# Altium PCB alarmlight_v1_0.PcbDoc
Units mil, origin at the board's own origin, x right, y up, seen from the top; angles counter-clockwise.
Board outline 1779.68 x 1779.68 mil, 2 copper layers (Top Layer, Bottom Layer); 36 components, 31 nets, 171 pads, 55 vias.
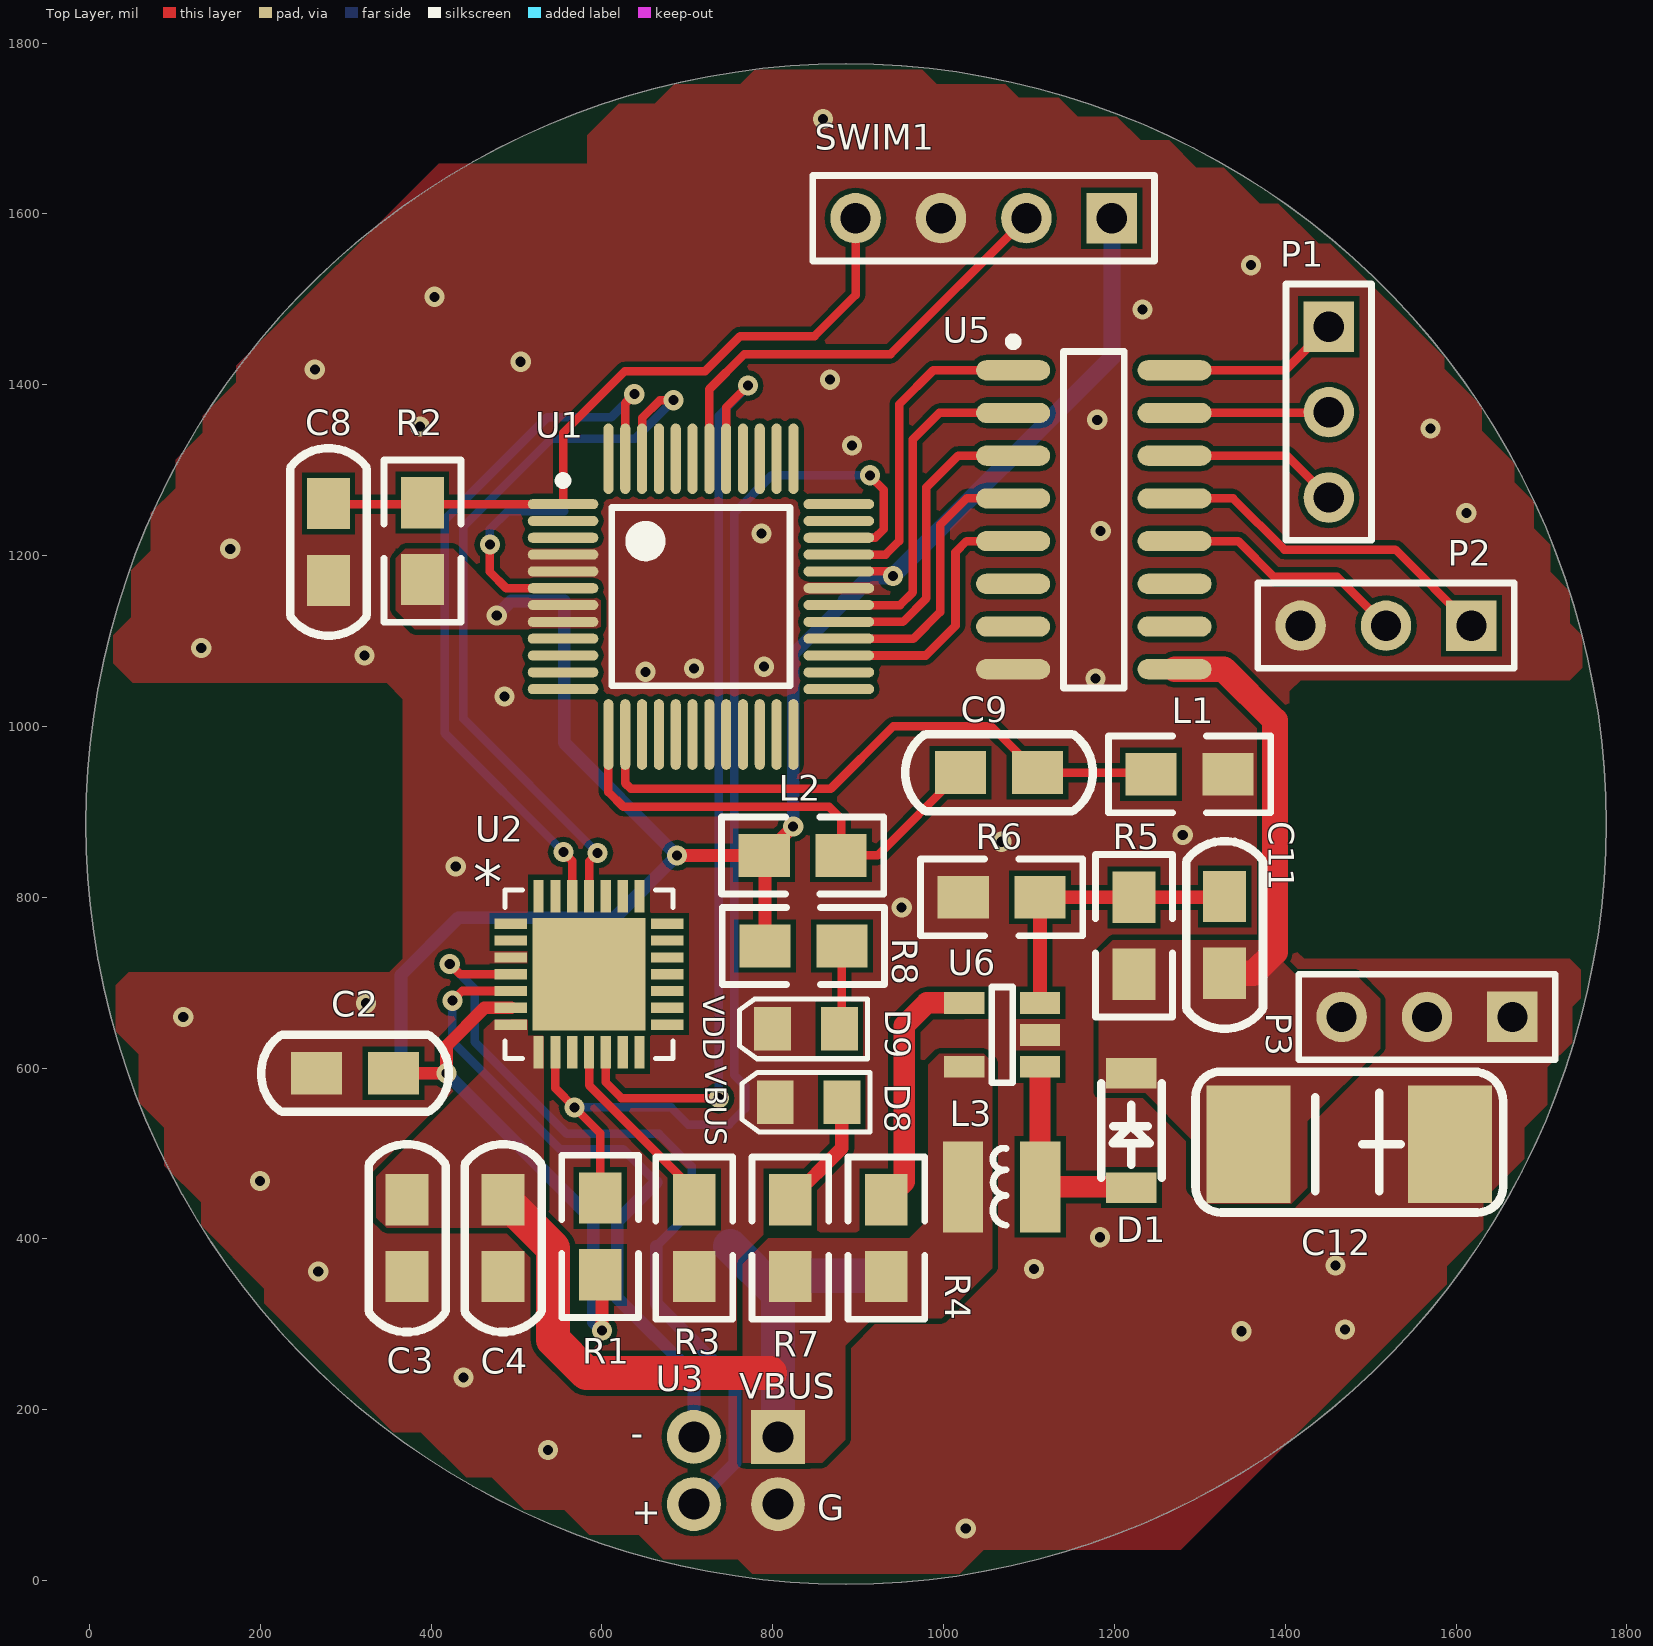
[diagram p0: Top Layer view]
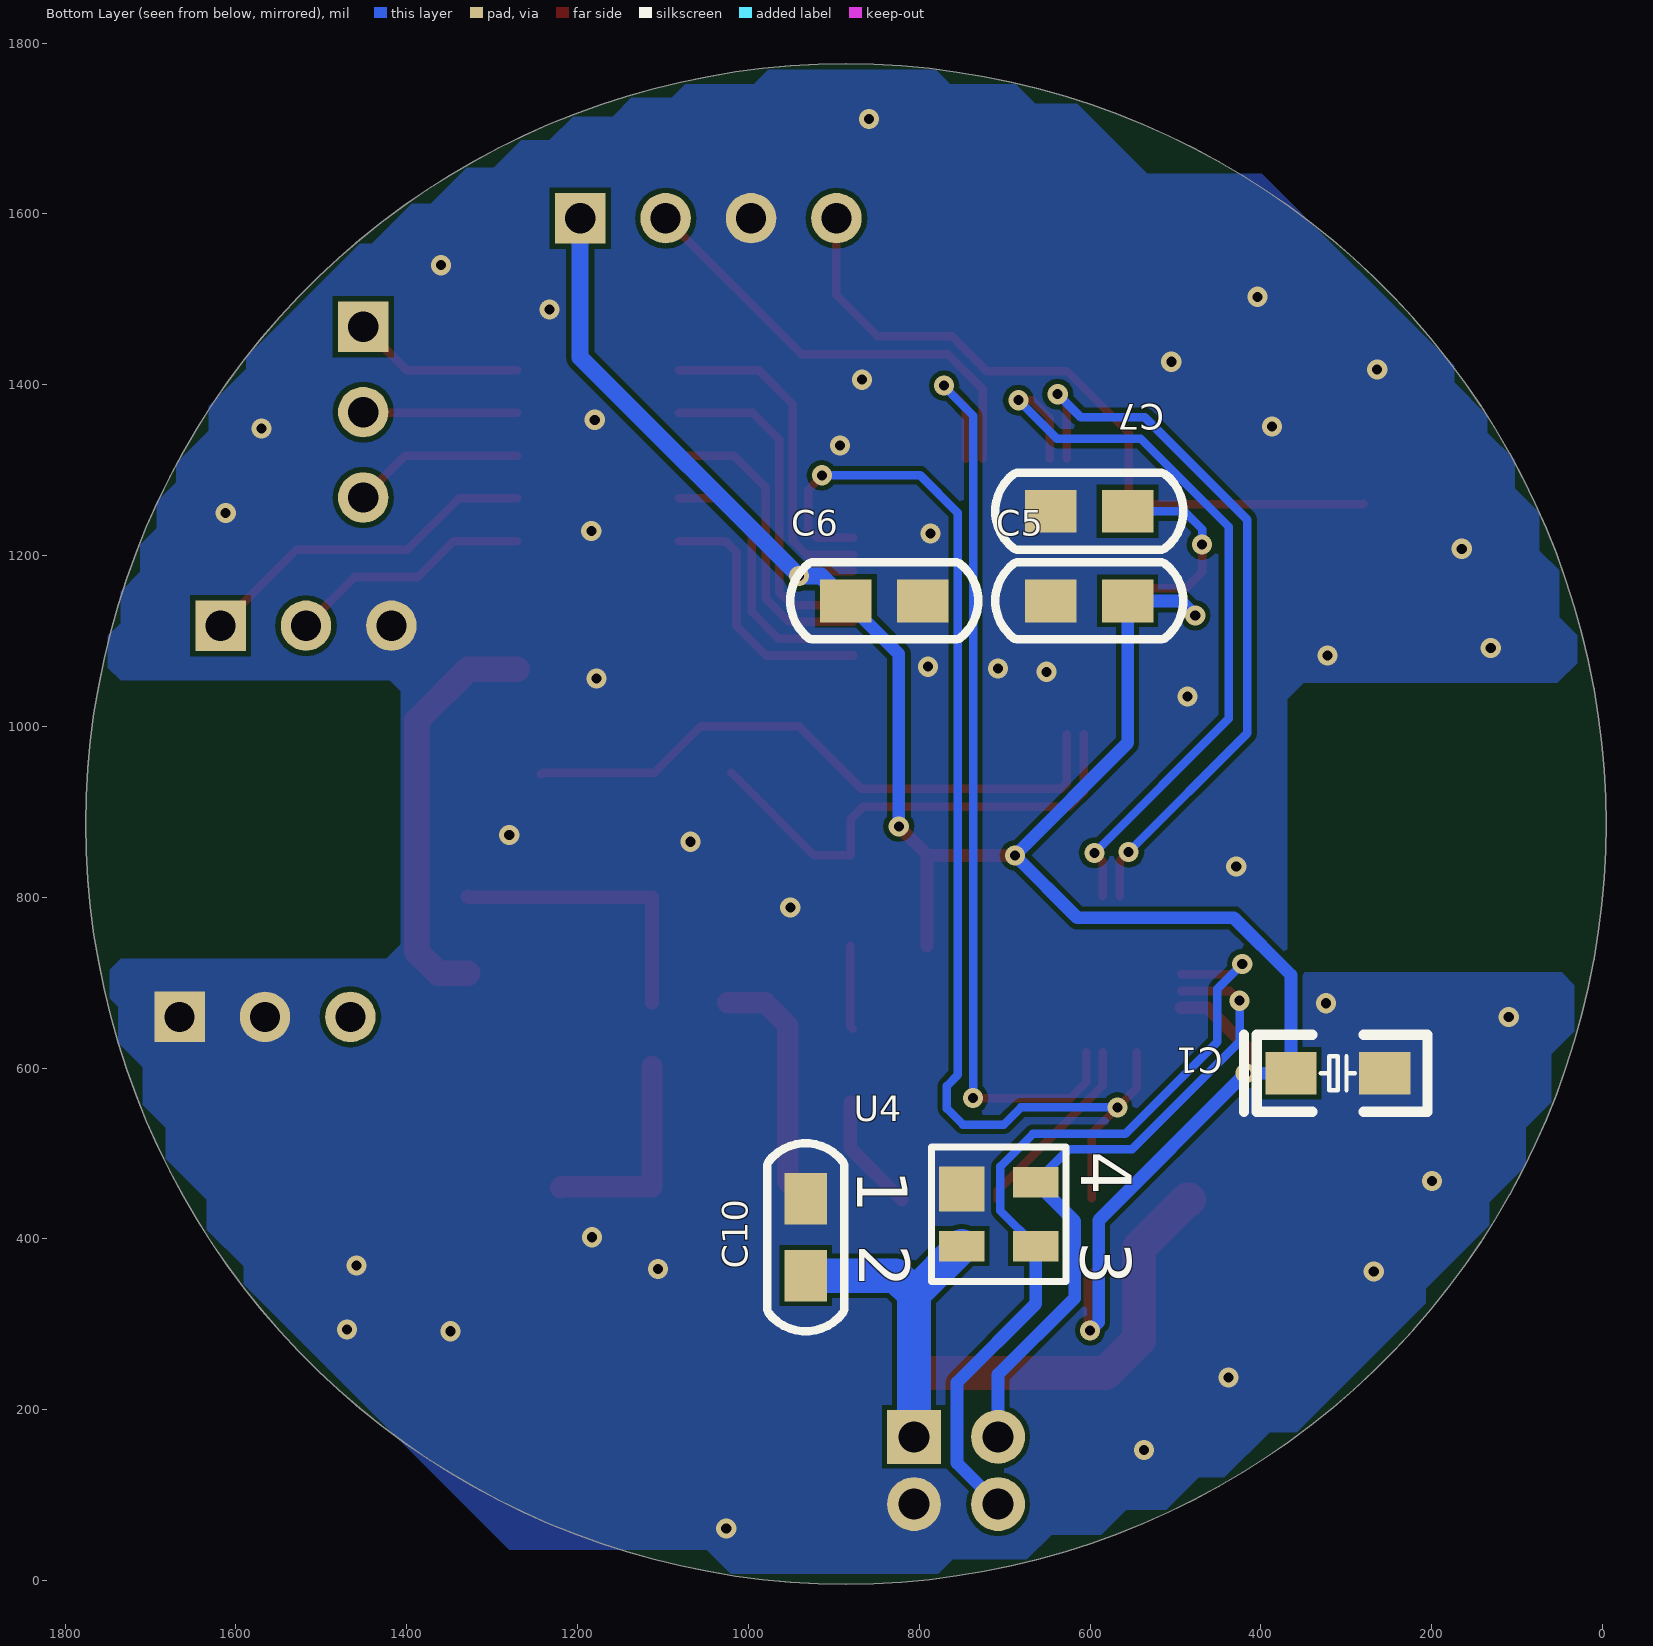
[diagram p1: Bottom Layer view, seen from below]
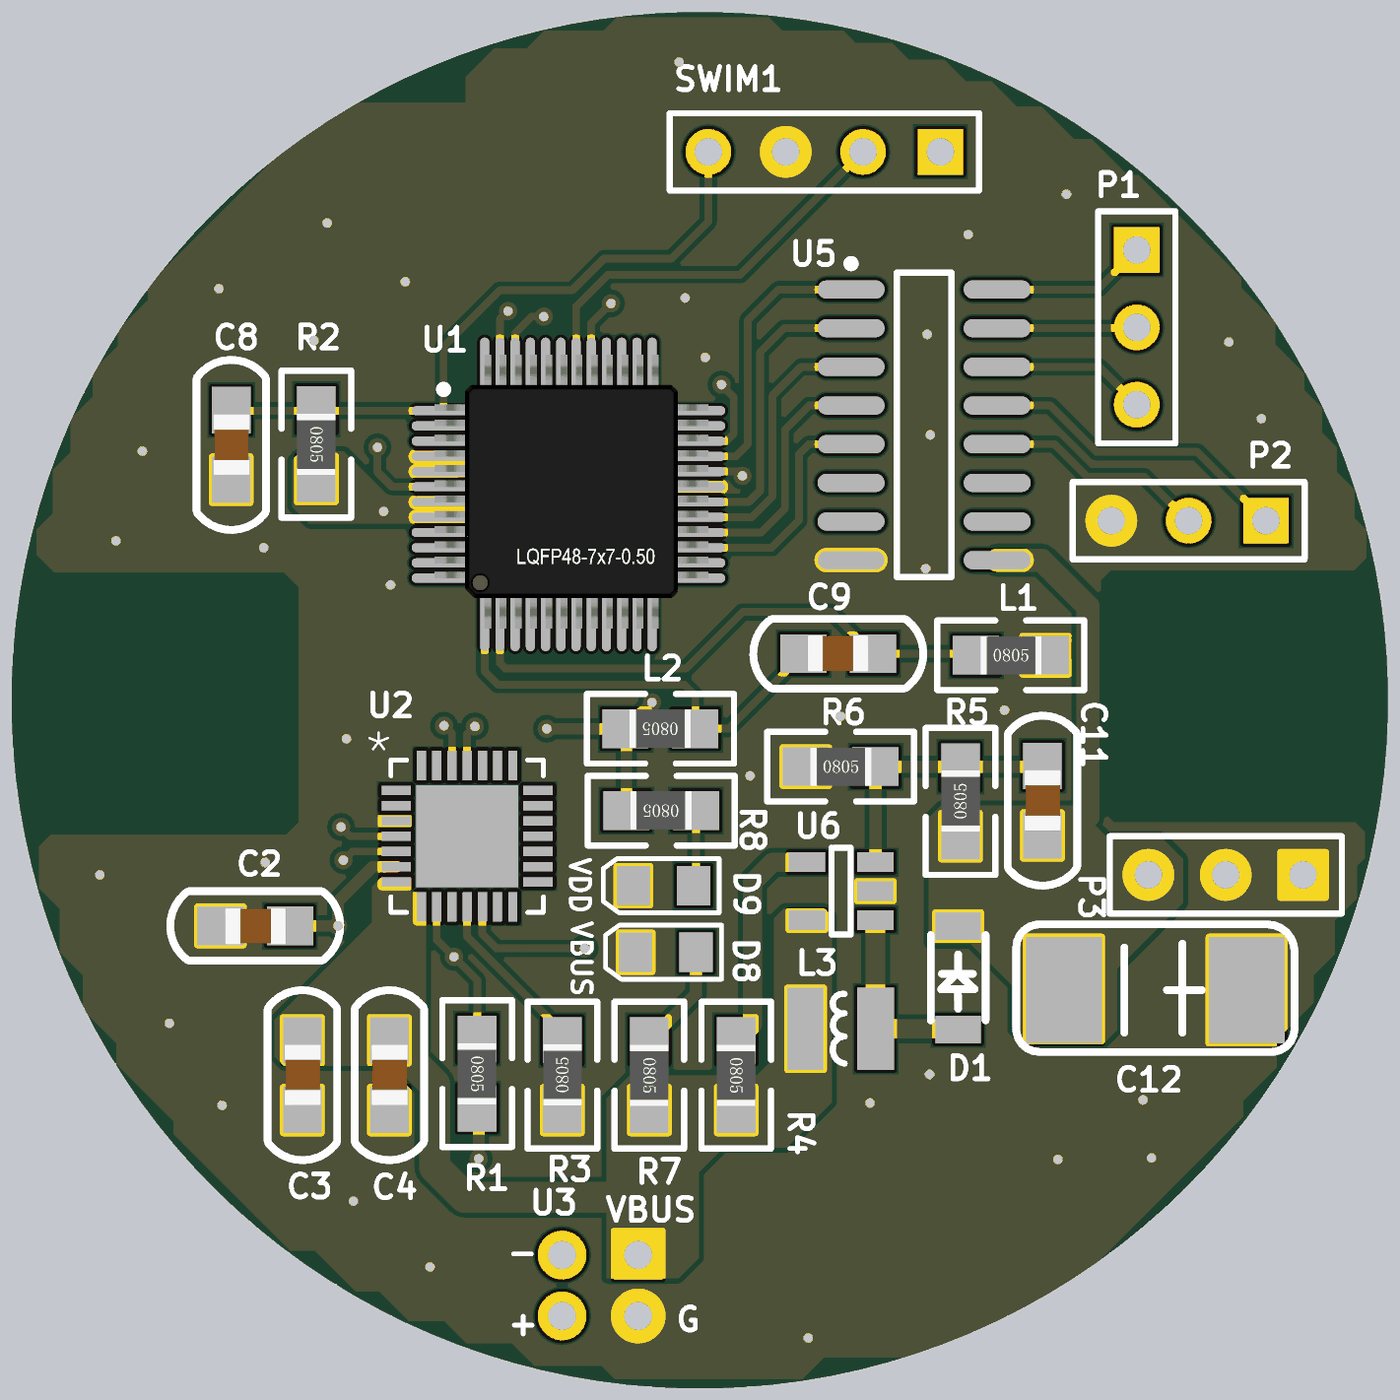
[diagram p2: 3D render of the assembled board from above, using the file's embedded part models]
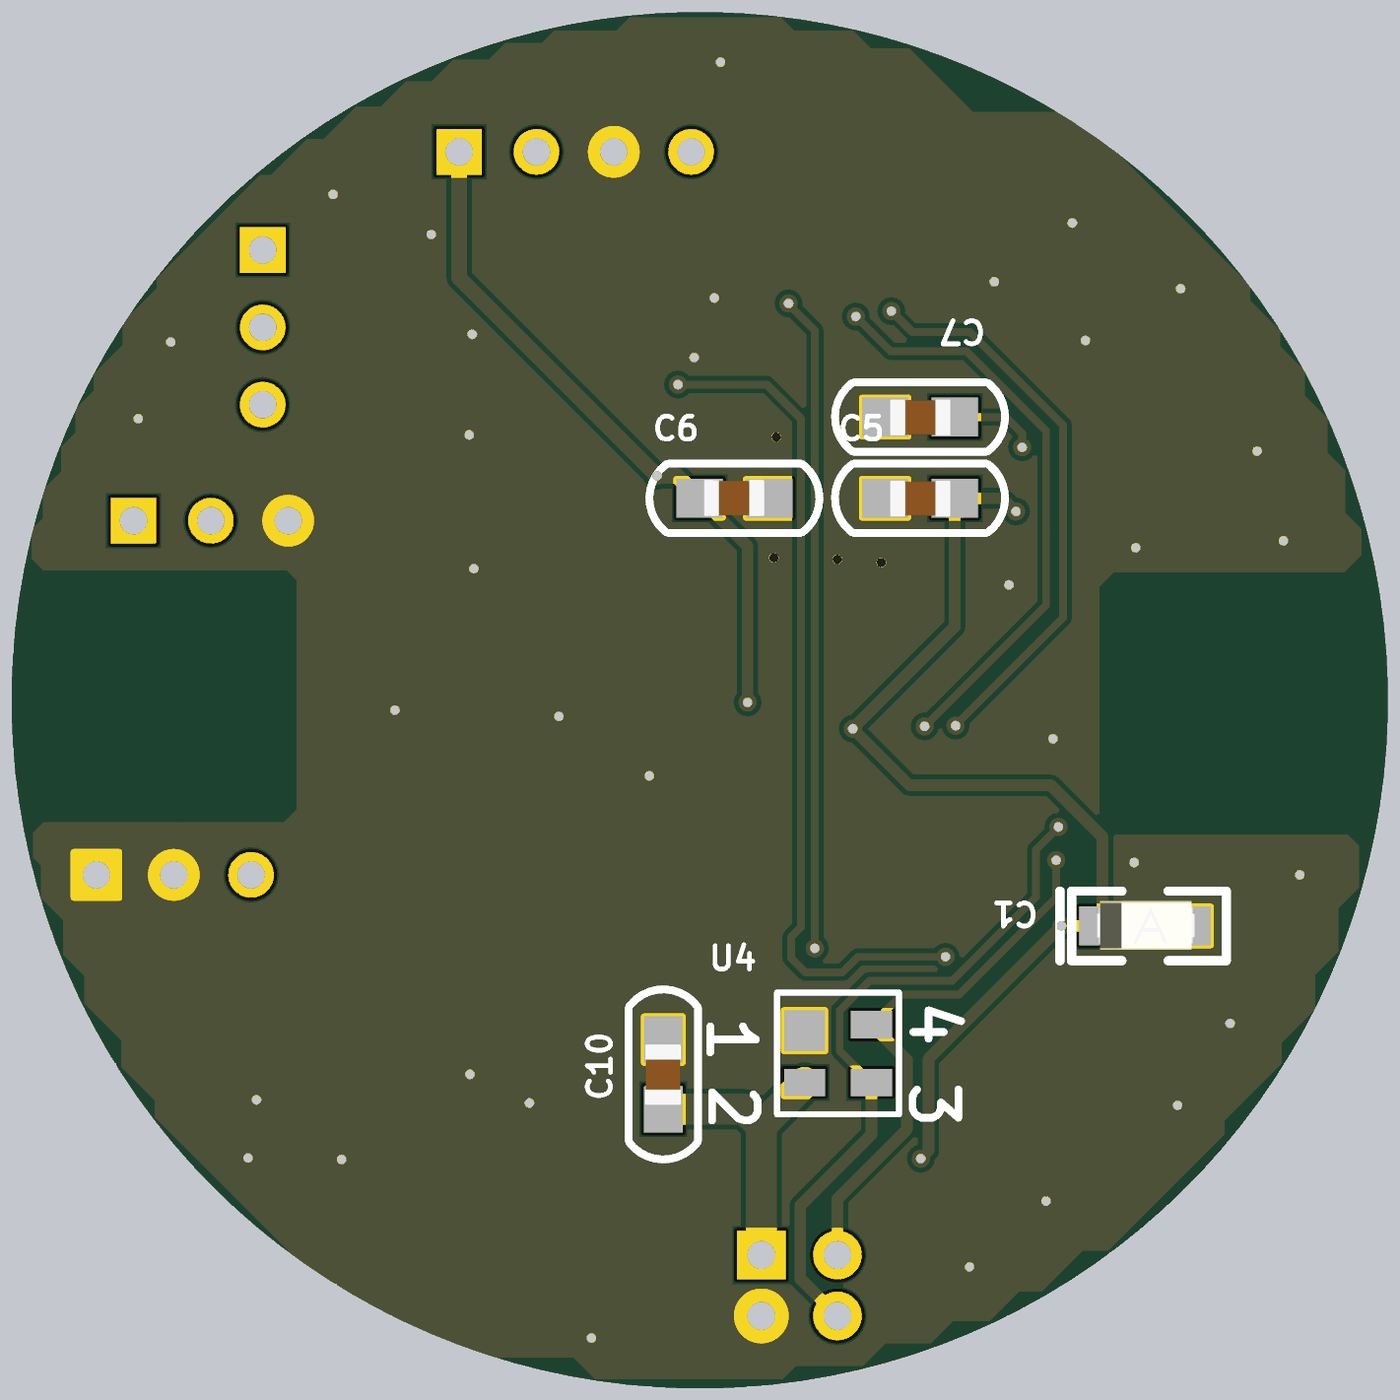
[diagram p3: 3D render of the assembled board from below, using the file's embedded part models]

## Layer stack, top to bottom
Top Solder: solder mask 0.4, Solder Resist, Dk 3.5
Top Layer: signal copper 1.4
Dielectric1: dielectric 12.6, FR-4, Dk 4.8
Bottom Layer: signal copper 1.4
Bottom Solder: solder mask 0.4, Solder Resist, Dk 3.5

## Board outline
9.99,728.57 cw(c885.83,885.83) -4.01,885.83 cw(c885.83,885.83) 9.99,1043.08 cw(c15,1043.31) 10.39,1045.27 cw(c885.83,885.83) 885.83,1775.67 cw(c885.83,885.83) 1775.67,885.83 cw(c885.83,885.83) 885.83,-4.02 cw(c885.83,885.83) 10.39,726.38 cw(c15,728.35)

## Design rules (kind name [scope] priority, off if disabled: settings)
Clearance Clearance_1 [All] p1: gap=6 ignorepadtopadclearanceinfootprint=FALSE except(0: Arc-Hole Track-Hole SMDPad-Hole THPad-Hole Via-Hole Fill-Hole Poly-Hole Region-Hole Text-Hole)
Clearance POLYGON [InPolygon] p2: gap=10 ignorepadtopadclearanceinfootprint=FALSE
HoleSize [All] p1: absolutevalues=TRUE maxlimit=1000 minlimit=1 maxpercent=80.000 minpercent=20.000
HoleToHoleClearance [All] p1: gap=0 allowstackedmicrovias=TRUE
MinimumSolderMaskSliver [All] p1: minsoldermaskwidth=0
PolygonConnect [All] p1: connectstyle=Direct reliefconductorwidth=10 reliefentries=4 polygonreliefangle="90 Angle" airgapwidth=10
RoutingVias [All] p1: holewidth=11.81 width=23.62 viastyle="Through Hole" minholewidth=11.81 minwidth=23.62 maxholewidth=27.99 maxwidth=50
SilkToSilkClearance [All] p1: silktosilkclearance=0
SilkToSolderMaskClearance SilkscreenOverComponentPads [IsPad] p1: minsilkscreentomaskgap=0 clearancetoexposedcopper=TRUE
SolderMaskExpansion [All] p1: expansion=4
Width [All] p1: maxlimit=100 minlimit=6 preferedwidth=6
25 further rules are at their usual default settings.

## Components (designator, comment, footprint, x,y, rotation, side; value= is the part's Value field where it differs from the comment)
C1 "4.7uF" TC3216 310,594 r180 bottom value=10uF
C2 "100nF" 0805C 311,594 r0 top value=100pF
C3 "1uF" 0805C 372,401 r90 top value=100pF
C4 "100nF" 0805C 484.4,401 r90 top value=100pF
C5 "100nF" 0805C 601,1147 r180 bottom value=100pF
C6 "100nF" 0805C 841,1147 r0 bottom value=100pF
C7 "Cap" 0805C 601,1252 r180 bottom value=470nf
C8 "100nF" 0805C 280,1216 r90 top value=100pF
C9 "100nF" 0805C 1065,946 r180 top value=100pF
C10 "2.2uF" 0805C 933,402 r270 bottom value=100pF
C11 "220pF" 0805C 1329,756 r90 top value=100pF
C12 "4.7uF" C-6032 1475,511 r180 top value=100pF
D1 "MBR0530" SOD_123 1220,527 r90 top
D8 "LED-3mm" Diode-LED-0805 881,560 r180 top value=green
D9 "LED-3mm" Diode-LED-0805 878,646 r180 top value=green
L1 "Inductor" 0805R 1243,944 r0 top value=10uH
L2 "Inductor" 0805R 880,849 r180 top value=10uH
L3 "Inductor" SWPA3012 1068,461 r0 top value=10uH
P1 "Header 3" HDR1X3 1451,1468 r270 top
P2 "Header 3" HDR1X3 1618,1118 r180 top
P3 "Header 3" HDR1X3 1666,660 r180 top
R1 "4.7K" 0805R 598,448 r270 top value=1K
R2 "10K" 0805R 390,1262 r270 top value=1K
R3 "10K" 0805R 708.2,356 r90 top value=1K
R4 "51K" 0805R 933,446 r270 top value=1K
R5 "117K" 0805R 1223,710 r90 top value=1K
R6 "13.3K" 0805R 1023,800 r0 top value=1K
R7 "4.7K" 0805R 820.6,446 r270 top value=1K
R8 "4.7K" 0805R 881,743 r180 top value=1K
SWIM1 "Header 4" HDR1X4 1197,1595 r180 top
U1 "STM8S105CXT6C" LQFP48 716,1152 r0 top
U2 "CP2102" QFN28N5X5-0p5P 585,710 r0 top value=Value
U3 "USB(B)" USB2.5-2H4D 757,129 r270 top
U4 "SP0503BA" SOT143 707,429 r270 bottom
U5 "ULN2003AD" D016_N 1176,1242 r0 top
U6 "LM27313" SOT-23-5 1113,601.6 r180 top

## Footprints (in the part's own frame and the unit in brackets; to place one, negate y for a bottom-side part, rotate by r counter-clockwise, add the part's x,y. Pads: shape width x height; smd on the part's side, far side on the other; paste and mask are expansions set on the pad)
0805C [mil]
  rect 60x50 smd: 1(-45,0) 2(45,0)
  silkscreen extent -110,-45 110,45, body extent -39,-24 40,23, height 47
0805R [mil]
  rect 60x50 smd: 1(0,0) 2(90,0)
  silkscreen extent -50,-45 140,45, body extent 6,-25 85,25, height 22
C-6032 [mm] "C-6032"
  rect 2.5x3.5 smd: 1(-3,0) 2(3,0)
  silkscreen extent -4.57,-2.16 4.57,2.03
D016_N [mm] "SOIC, 16-Leads, Body 9.9x3.9mm, Pitch 1.27mm, IPC Medium Density"
  oval 2.2x0.6 smd: 1(-2.4,4.445) 2(-2.4,3.175) 3(-2.4,1.905) 4(-2.4,0.635) 5(-2.4,-0.635) 6(-2.4,-1.905) 7(-2.4,-3.175) 8(-2.4,-4.445) 9(2.4,-4.445) 10(2.4,-3.175) 11(2.4,-1.905) 12(2.4,-0.635) 13(2.4,0.635) 14(2.4,1.905) 15(2.4,3.175) 16(2.4,4.445)
  silkscreen extent -2.52,-5 0.9,5.42, body extent -2,-5 2,5, height 1.75
Diode-LED-0805 [mm]
  rect 1.1x1.3 smd: A(0,0) K(1.981,0)
  silkscreen extent -0.84,-0.89 2.97,0.89
HDR1X3 [mm] "Connector; Header; 3 Position"
  rect 1.5x1.5 hole 0.9: 1(0,0)
  round 1.5 hole 0.9: 2(2.54,0) 3(5.08,0)
  silkscreen extent -1.27,-1.27 6.35,1.27
HDR1X4 [mm]
  rect 1.5x1.5 hole 0.9: 1(0,0)
  round 1.5 hole 0.9: 2(2.54,0) 3(5.08,0) 4(7.62,0)
  silkscreen extent -1.27,-1.27 8.89,1.27
LQFP48 [mm]
  oval 2.1x0.3 smd: 1(-4.1,2.75) 2(-4.1,2.25) 3(-4.1,1.75) 4(-4.1,1.25) 5(-4.1,0.75) 6(-4.1,0.25) 7(-4.1,-0.25) 8(-4.1,-0.75) 9(-4.1,-1.25) 10(-4.1,-1.75) 11(-4.1,-2.25) 12(-4.1,-2.75) 25(4.1,-2.75) 26(4.1,-2.25) 27(4.1,-1.75) 28(4.1,-1.25) 29(4.1,-0.75) 30(4.1,-0.25) 31(4.1,0.25) 32(4.1,0.75) 33(4.1,1.25) 34(4.1,1.75) 35(4.1,2.25) 36(4.1,2.75)
  oval 0.3x2.1 smd: 13(-2.75,-4.1) 14(-2.25,-4.1) 15(-1.75,-4.1) 16(-1.25,-4.1) 17(-0.75,-4.1) 18(-0.25,-4.1) 19(0.25,-4.1) 20(0.75,-4.1) 21(1.25,-4.1) 22(1.75,-4.1) 23(2.25,-4.1) 24(2.75,-4.1) 37(2.75,4.1) 38(2.25,4.1) 39(1.75,4.1) 40(1.25,4.1) 41(0.75,4.1) 42(0.25,4.1) 43(-0.25,4.1) 44(-0.75,4.1) 45(-1.25,4.1) 46(-1.75,4.1) 47(-2.25,4.1) 48(-2.75,4.1)
  silkscreen extent -4.22,-2.65 2.65,3.57, body extent -4.4,-4.4 4.6,4.6, height 1.45
QFN28N5X5-0p5P [mil]
  rect 38x12 smd mask+5: 1(-91.5,59.06) 2(-91.5,39.37) 3(-91.5,19.68) 4(-91.5,0) 5(-91.5,-19.68) 6(-91.5,-39.37) 7(-91.5,-59.06) 15(91.5,-59.05) 16(91.5,-39.37) 17(91.5,-19.68) 18(91.5,0) 19(91.5,19.68) 20(91.5,39.37) 21(91.5,59.06)
  rect 12x38 smd mask+5: 8(-59.06,-91.5) 9(-39.37,-91.5) 10(-19.68,-91.5) 11(0,-91.5) 12(19.68,-91.5) 13(39.37,-91.5) 14(59.05,-91.5) 22(59.06,91.5) 23(39.37,91.5) 24(19.68,91.5) 25(0,91.5) 26(-19.68,91.5) 27(-39.37,91.5) 28(-59.05,91.5)
  rect 132x132 smd mask-65.5: 29(0,0)
  silkscreen extent -98,-98 98,98
SOD_123 [mm]
  rect 0.9x1.5 smd: 1(-1.7,0) 2(1.7,0)
  silkscreen extent -1.4,-0.9 1.4,0.9
SOT143 [mm]
  rect 1.35x1.35 smd: 1(-0.75,-1.1)
  rect 0.9x1.35 smd: 2(0.95,-1.1) 3(0.95,1.1) 4(-0.95,1.1)
  silkscreen extent -2,-2 2,2
SOT-23-5 [mm]
  rect 1.2x0.65 smd: 1(0,0) 2(0,-0.95) 3(0,-1.9) 4(2.25,-1.9) 5(2.25,0)
  silkscreen extent 0.82,-2.38 1.44,0.48
SWPA3012 [mm]
  rect 1.2x2.7 smd: 1(-1.15,0) 2(1.15,0)
  silkscreen extent -0.26,-1.14 0.13,1.15
TC3216 [mil]
  rect 60x50 smd: 1(-55,0) 2(55,0)
  silkscreen extent -110,-45 105,45, body extent -62,-31 64,32, height 63
USB2.5-2H4D [mm]
  rect 1.6x1.6 hole 0.92: 1(-1,1.25)
  round 1.6 hole 0.92: 2(-1,-1.25) 3(1,-1.25) 4(1,1.25)

## Part data
C1: library part "Cap Pol1_4", "Polarized Capacitor (Radial)", Published=8-Jun-2000, Publisher="Altium Limited", Revision="July-2002: Re-released for DXP Platform."
C2 C3 C4 C5 C6 C8 C9 C10 C11 C12: library part CAP, "Capacitor", Published=8-Jun-2000, Publisher="Altium Limited", Revision="July-2002: Re-released for DXP Platform."
C7: "Capacitor", LatestRevisionDate=17-Jul-2002, LatestRevisionNote="Re-released for DXP Platform.", PackageReference=RAD-0.3, Published=8-Jun-2000, Publisher="Altium Limited"
D1: library part Diode, "Default Diode", Code_JEDEC=DO-214-AB, LatestRevisionDate=17-Jul-2002, LatestRevisionNote="Re-released for DXP Platform.", PackageDescription="DO-214-AB/SMC; 2 C-Bend Leads; Body 7.9 x 5.9 mm, inc. leads (LxW)", PackageReference=SMC, PackageVersion=Sep-1996, Published=8-Jun-2000, Publisher="Altium Limited"
D8 D9: library part Diode-LED-1210
P1 P2 P3: "Header, 3-Pin", LatestRevisionDate=17-Jul-2002, LatestRevisionNote="Re-released for DXP Platform.", Publisher="Altium Limited"
R1 R2 R3 R4 R5 R6 R7 R8: library part res1, "Resistor", Published=8-Jun-2000, Publisher="Altium Limited", Revision="July-2002: Re-released for DXP Platform."
SWIM1: "Header, 4-Pin", LatestRevisionDate=17-Jul-2002, LatestRevisionNote="Re-released for DXP Platform.", Publisher="Altium Limited"
U1: library part STM8S105C4T6C, "ST 8-bit  Microcontroller"
U2: "Imported", MFG #1="SILICON LABS", PART DESC="SINGLE-CHIP USB TO UART BRIDGE, QFN28, RoHS.", PART NUMBER=CP2102, RefDes=RefDes, Type=DEV
U5: "Darlington Transistor Array", Code_IPC=SOIC127P600-16, ComponentLink1Description="Manufacturer Link", ComponentLink1URL=http://www.ti.com/, ComponentLink2Description=Datasheet, ComponentLink2URL=http://www-s.ti.com/sc/ds/uln2002a.pdf, DatasheetVersion=Sep-1986, LatestRevisionDate=13-Apr-2006, LatestRevisionNote="IPC-7351 Footprint Added.", PackageDescription="16-Pin Small Outline Integrated Circuit 1.27 mm Pitch", PackageReference=D016, PackageVersion=Jan-1998, Published=15-May-2002, Publisher="Altium Limited"
L1 L2: Code_IEC=1005, Code_JEITA=0402, LatestRevisionDate=17-Jul-2002, LatestRevisionNote="Re-released for DXP Platform.", PackageReference=0402-A, Published=8-Jun-2000, Publisher="Altium Limited"
L3: Code_IEC=1005, Code_JEITA=0402, LatestRevisionDate=29-May-2009, LatestRevisionNote="IPC-7351 Footprint Added.", PackageDescription="Chip Inductor", PackageReference=0402-A, Published=8-Jun-2000, Publisher="Altium Limited"

## Via types
v1: diameter 23.62, hole 11.81, Top Layer to Bottom Layer, tented both sides, 55 vias

## Nets (pads, with @x,y where several pads share a name; then routed paths per layer and width w, separated by ;. In a path a pad name is that pad's centre, name@x,y a point inside that pad or via, vN(x,y) a via of type N, cw(c..) or ccw(c..) an arc to the next point about the centre after c; other vN are vias at no path point)
12V: C11.1 C12.2 D1.2 P3.3 R5.1 U5.9 | length 482.7
  Top Layer w30: U5.9 1328,1067 1388,1007 1388,736 1363,711 C11.1
CP2102_RST: R1.1 U1.34 U2.9 | length 1413.9
  Top Layer w10: U2.9 545.63,576.37 v1(568,554) 598,524 R1.1 ; U1.34 919.9,1220.9 929.76,1230.76 929.76,1277.24 914,1293 v1(914,1294)
  Bottom Layer w10: v1(568,554) 681,554 701,534 749,534 767.74,552.74 767.74,579.29 755,592.03 755,1250 799,1294 v1(914,1294)
CP2102_RXD: U1.46 U2.25 | length 902.2
  Top Layer w10: U2.25 585,842 v1(595,852) ; U1.46 647.1,1361.1 668,1382 v1(684,1382)
  Bottom Layer w10: v1(595,852) 438,1009 438,1234 541,1337 639,1337 v1(684,1382)
CP2102_SUSP: U1.41 U2.12 | length 1119.3
  Top Layer w10: U2.12 604.68,583.32 623,565 v1(737,565) ; U1.41 745.53,1373.53 v1(771,1399)
  Bottom Layer w10: v1(737,565) 737,1364 771,1398 v1(771,1399)
CP2102_TXD: U1.47 U2.26 | length 865.2
  Top Layer w10: v1(555,853) 565.32,842.68 U2.26 ; U1.47 627.42,1378.42 v1(638,1389)
  Bottom Layer w10: v1(555,853) 416,992 416,1242 536,1362 611,1362 v1(638,1389)
D+: U2.4 U3.3 U4.3 | length 964.6
  Top Layer w10: v1(422,722) 434,710 U2.4
  Bottom Layer w10: v1(422,722) 451,693 451,631 559,523 666.94,523 705,484.94 705,432.91 U4.3
  Bottom Layer w15: U4.3 663.69,324.31 756,232 756,137.84 U3.3
D-: U2.5 U3.2 U4.4 | length 782.2
  Top Layer w10: v1(425,679) 436.32,690.32 U2.5
  Bottom Layer w10: v1(425,679) 425,631 551,505 625.09,505 U4.4
  Bottom Layer w15: U4.4 618,420.71 618,331 707.79,241.21 U3.2
GND: C1.2 C2.1 C3.1 C4.1 C5.1 C6.1 C7.1 C8.1 C10.1 C12.1 D8.K D9.K L1.2 P2.3 P3.1 P3.2 R3.1 R6.1 SWIM1.3 U1.4 U1.5 U1.31 U2.3 U3.4 U4.1 U5.8 U6.2
  other v1: 1026,61 537,153 438,238 1349,292 1470,294 268,362 1106,365 1459,369 1183,402 200,468 110,660 324,676 951,788 429,836 1068,865 1280,873 486,1035 1178,1056 651,1064 708,1068 790,1070 322,1083 131,1092 165,1208 787,1226 1184,1229 1612,1250 893,1329 1570,1349 387,1351 1180,1359 867,1406 264,1418 505,1427 1233,1488 404,1503 1360,1540 859,1711
NetC7_2: C7.2 U1.6 | length 239.2
  Top Layer w10: v1(469,1213) 469,1181 488.16,1161.84 U1.6
  Bottom Layer w10: v1(469,1213) 469,1231 490,1252 C7.2
NetC11_2: C11.2 R5.2 R6.2 U6.3 | length 340
  Top Layer w16: U6.3 R6.2 R5.2 1328,800 C11.2
NetD1_1: D1.1 L3.2 U6.1 | length 247.8
  Top Layer w25: U6.1 1113,461.28 L3.2 1219.07,461 D1.1
NetD8_A: D8.A R7.1 | length 139
  Top Layer w16: R7.1 881,506.4 D8.A
NetD9_A: D9.A R8.1 | length 98.2
  Top Layer w10: D9.A 881,649 R8.1
NetR3_2: R3.2 U2.11 | length 223.5
  Top Layer w10: U2.11 585,580 708.2,456.8 R3.2
NetR4_1: R4.1 U6.4 | length 294.1
  Top Layer w25: R4.1 954,467 954,650 980.4,676.4 U6.4
NRST: C8.2 R2.1 SWIM1.4 U1.1 | length 857.5
  Top Layer w10: C8.2 280.73,1260.27 U1.1 554.58,1343.58 627,1416 721,1416 762,1457 849,1457 897,1505 SWIM1.4
RELAYCTR1: P1.1 U5.16 | length 201.6
  Top Layer w10: U5.16 1400,1417 P1.1
RELAYCTR2: P1.2 U5.15 | length 180.9
  Top Layer w10: U5.15 1450,1367 P1.2
RELAYCTR3: P1.3 U5.14 | length 200.8
  Top Layer w10: U5.14 1402,1317 P1.3
RELAYCTR4: P2.1 U5.13 | length 409.2
  Top Layer w10: U5.13 1339,1267 1399,1207 1529,1207 P2.1
RELAYCTR5: P2.2 U5.12 | length 288.5
  Top Layer w10: U5.12 1345,1217 1387,1175 1461,1175 P2.2
RELAYCTRIO1: U1.33 U5.1 | length 387.2
  Top Layer w10: U1.33 932.21,1201.21 948,1217 948,1377 988,1417 U5.1
RELAYCTRIO2: U1.30 U5.2 | length 402.1
  Top Layer w10: U1.30 949.16,1142.16 964,1157 964,1336 995,1367 U5.2
RELAYCTRIO3: U1.29 U5.3 | length 360.8
  Top Layer w10: U1.29 952.47,1122.47 980,1150 980,1280 1017,1317 U5.3
RELAYCTRIO4: U1.28 U5.4 | length 331.9
  Top Layer w10: U1.28 964.79,1102.79 996,1134 996,1236 1027,1267 U5.4
RELAYCTRIO5: U1.27 U5.5 | length 309.9
  Top Layer w10: U1.27 979.1,1083.1 1014,1118 1014,1204 1027,1217 U5.5
SWIM: SWIM1.2 U1.42 | length 535.5
  Top Layer w10: U1.42 725.84,1394.84 767,1436 938,1436 SWIM1.2
VBUS: C3.2 C4.2 C10.2 L3.1 R4.2 R7.2 U2.7 U2.8 U3.1 U4.2 U6.5 | length 841.5
  Top Layer w40: C4.2 486.17,446 543,389.17 543,282 582,243 797,243
  Bottom Layer w40: U4.2 806.21,335.69 ; U3.1 806.21,335.69 ; C10.2 827.52,357 806.21,335.69
VDD: C1.1 C2.2 C5.2 C6.2 L2.2 R1.2 R2.2 R8.2 SWIM1.1 U1.7 U1.8 U1.32 U2.6 | length 2822
  Top Layer w10: U1.32 935.47,1181.53 v1(941,1176)
  Top Layer w15: C2.2 v1(418,594) 418,626 462.63,670.63 U2.6 ; R1.2 600,356 v1(600,293) ; v1(688,849) L2.2 ; R8.2 791,848 L2.2 ; v1(824,883) L2.2
  Bottom Layer w15: v1(477,1130) 494,1147 C5.2 556,981 v1(688,849) 615,776 432,776 365,709 C1.1 v1(418,594) 590,422 590,303 v1(600,293) ; v1(824,883) 824,1085 C6.2
  Bottom Layer w20: C6.2 915,1176 v1(941,1176) 1197,1432 SWIM1.1
VDDA: C9.2 L2.1 U1.13 | length 575.7
  Top Layer w10: U1.13 607.73,923.27 625,906 866,906 880,892 L2.1 923,849 C9.2
VSSA: C9.1 L1.1 U1.14 | length 728.7
  Top Layer w10: U1.14 627.42,933.58 634,927 868,927 941,1000 1056,1000 C9.1 1241,946 L1.1
pads on no net: U1.2 U1.3 U1.9 U1.10 U1.11 U1.12 U1.15 U1.16 U1.17 U1.18 U1.19 U1.20 U1.21 U1.22 U1.23 U1.24 U1.25 U1.26 U1.35 U1.36 U1.37 U1.38 U1.39 U1.40 U1.43 U1.44 U1.45 U1.48 U2.1 U2.2 U2.10 U2.13 U2.14 U2.15 U2.16 U2.17 U2.18 U2.19 U2.20 U2.21 U2.22 U2.23 U2.24 U2.27 U2.28 U2.29 U5.6 U5.7 U5.10 U5.11

## Polygon pours and split planes (outlines as drawn)
VBUS on Top Layer "TOP Layer-vbus" (solid, remove dead copper, pour order 0): 765,138 765,371 795,401 960,401 982,423 982,604 995,617 1047,617 1057,607 1057,366 998,307 917,307 885,275 885,165 858,138
12V on Top Layer "TOP Layer-12V" (solid, remove dead copper, pour order 2): 1182,571 1236,571 1290,517 1290,459 1308,441 1407,441 1426,460 1426,538 1511,623 1511,681 1482,710 1412,710 1372,750 1198,750 1182,734
VBUS on Top Layer "TOP Layer-VBUS" (solid, remove dead copper, pour order 16): 532,637 532,435 510,413 348,413 336,425 336,473 462,599 462,645 474,657 512,657
GND on Top Layer "TOP Layer-GND" (solid, remove dead copper, pour order 18): 1278,36 1589,347 1589,368 1632,411 1632,446 1680,494 1680,530 1707,557 1707,601 1736,630 1736,672 1746,682 1746,715 1733,728 1422,728 1405,745 1405,1041 1418,1054 1733,1054 1748,1069 1748,1106 1733,1121 1733,1158 1710,1181 1710,1213 1691,1232 1691,1263 1668,1286 1668,1308 1630,1346 1630,1375 1586,1419 1586,1432 1453,1565 1439,1565 1392,1612 1370,1612 1328,1654 1296,1654 1264,1686 1231,1686 1203,1714 1157,1714 1135,1736 1088,1736 1072,1752 992,1752 975,1769 779,1769 762,1752 685,1752 662,1729 620,1729 583,1692 583,1679 583,1659 409,1659 172,1422 172,1403 133,1364 133,1344 101,1312 101,1279 72,1250 72,1206 49,1183 49,1128 28,1107 28,1074 51,1051 348,1051 367,1032 367,728 351,712 46,712 31,697 31,643 58,616 58,560 88,530 88,486 131,443 131,416 205,342 205,325 356,174 388,174 441,121 471,121 509,83 556,83 585,54 643,54 672,25 759,25 776,8 1019,8 1047,36
VDD on Top Layer "TOP Layer-VDD" (solid, remove dead copper, pour order 10): 598.6,1113.89 381.11,1113.89 359,1136 359,1197 370,1208 426,1208 480.74,1153.26 598.6,1153.26
GND on Bottom Layer "TOP Layer-GND" (solid, remove dead copper, pour order 20): 1280,36 1591,347 1591,368 1634,411 1634,446 1682,494 1682,530 1709,557 1709,601 1738,630 1738,672 1748,682 1748,715 1735,728 1424,728 1407,745 1407,1041 1420,1054 1735,1054 1750,1069 1750,1106 1735,1121 1735,1158 1712,1181 1712,1213 1693,1232 1693,1263 1670,1286 1670,1308 1632,1346 1632,1375 1588,1419 1588,1432 1455,1565 1441,1565 1394,1612 1372,1612 1330,1654 1298,1654 1266,1686 1233,1686 1205,1714 1159,1714 1137,1736 1090,1736 1074,1752 994,1752 977,1769 781,1769 764,1752 687,1752 664,1729 615,1729 533,1647 704,1476 533,1647 399,1647 174,1422 174,1403 135,1364 135,1344 103,1312 103,1279 74,1250 74,1206 51,1183 51,1128 30,1107 30,1074 53,1051 350,1051 369,1032 369,728 353,712 48,712 33,697 33,643 60,616 60,560 90,530 90,486 133,443 133,416 207,342 207,325 358,174 390,174 443,121 473,121 511,83 558,83 587,54 645,54 674,25 761,25 778,8 1021,8 1049,36

## Silkscreen, mask and mechanical layers (free items; w line width, h text height)
Top Overlay:
  text "VDD" at 718.74,685.09 h25 r270
  text "VBUS" at 721,603 h25 r270
  text "VBUS" at 760.91,212.74 h30
  text "-" at 634,158 h30
  text "G" at 852,71 h30
  text "+" at 635,66 h30
Mechanical 1:
  circle w8: c885.83,885.83 r885.83
  lines w10: 15,728.35 354.33,728.35 354.33,1043.31 15,1043.31 ; 525.22,1693.67 594.2,1436.26 854.13,1505.9 784.92,1764.2 ; 996.63,12.65 927.42,270.94 1187.35,340.59 1256.32,83.18 ; 1756,728.35 1417.32,728.35 1417.32,1043.31 1756,1043.31

## Text inside footprints (layer, text, board x,y; h text height)
U2: Top Overlay "*" at 449.5,793.9 h50; Mechanical 1 "*" at 449.5,793.9 h50
U4: Bottom Overlay "4" at 610.15,502.62 h59.06 r90; Bottom Overlay "1" at 872.75,481.76 h59.05 r90; Bottom Overlay "2" at 870.43,393.84 h59.06 r90; Bottom Overlay "3" at 610.98,397.39 h59.06 r90